# Altium PCB FreidoraAireCukiDigLeds_mirrored.PcbDoc
Units mil, origin at the board's own origin, x right, y up, seen from the top; angles counter-clockwise.
Board outline 3650 x 2850 mil, 2 copper layers (Top Layer, Bottom Layer); 50 components, 96 nets, 151 pads, 12 vias.
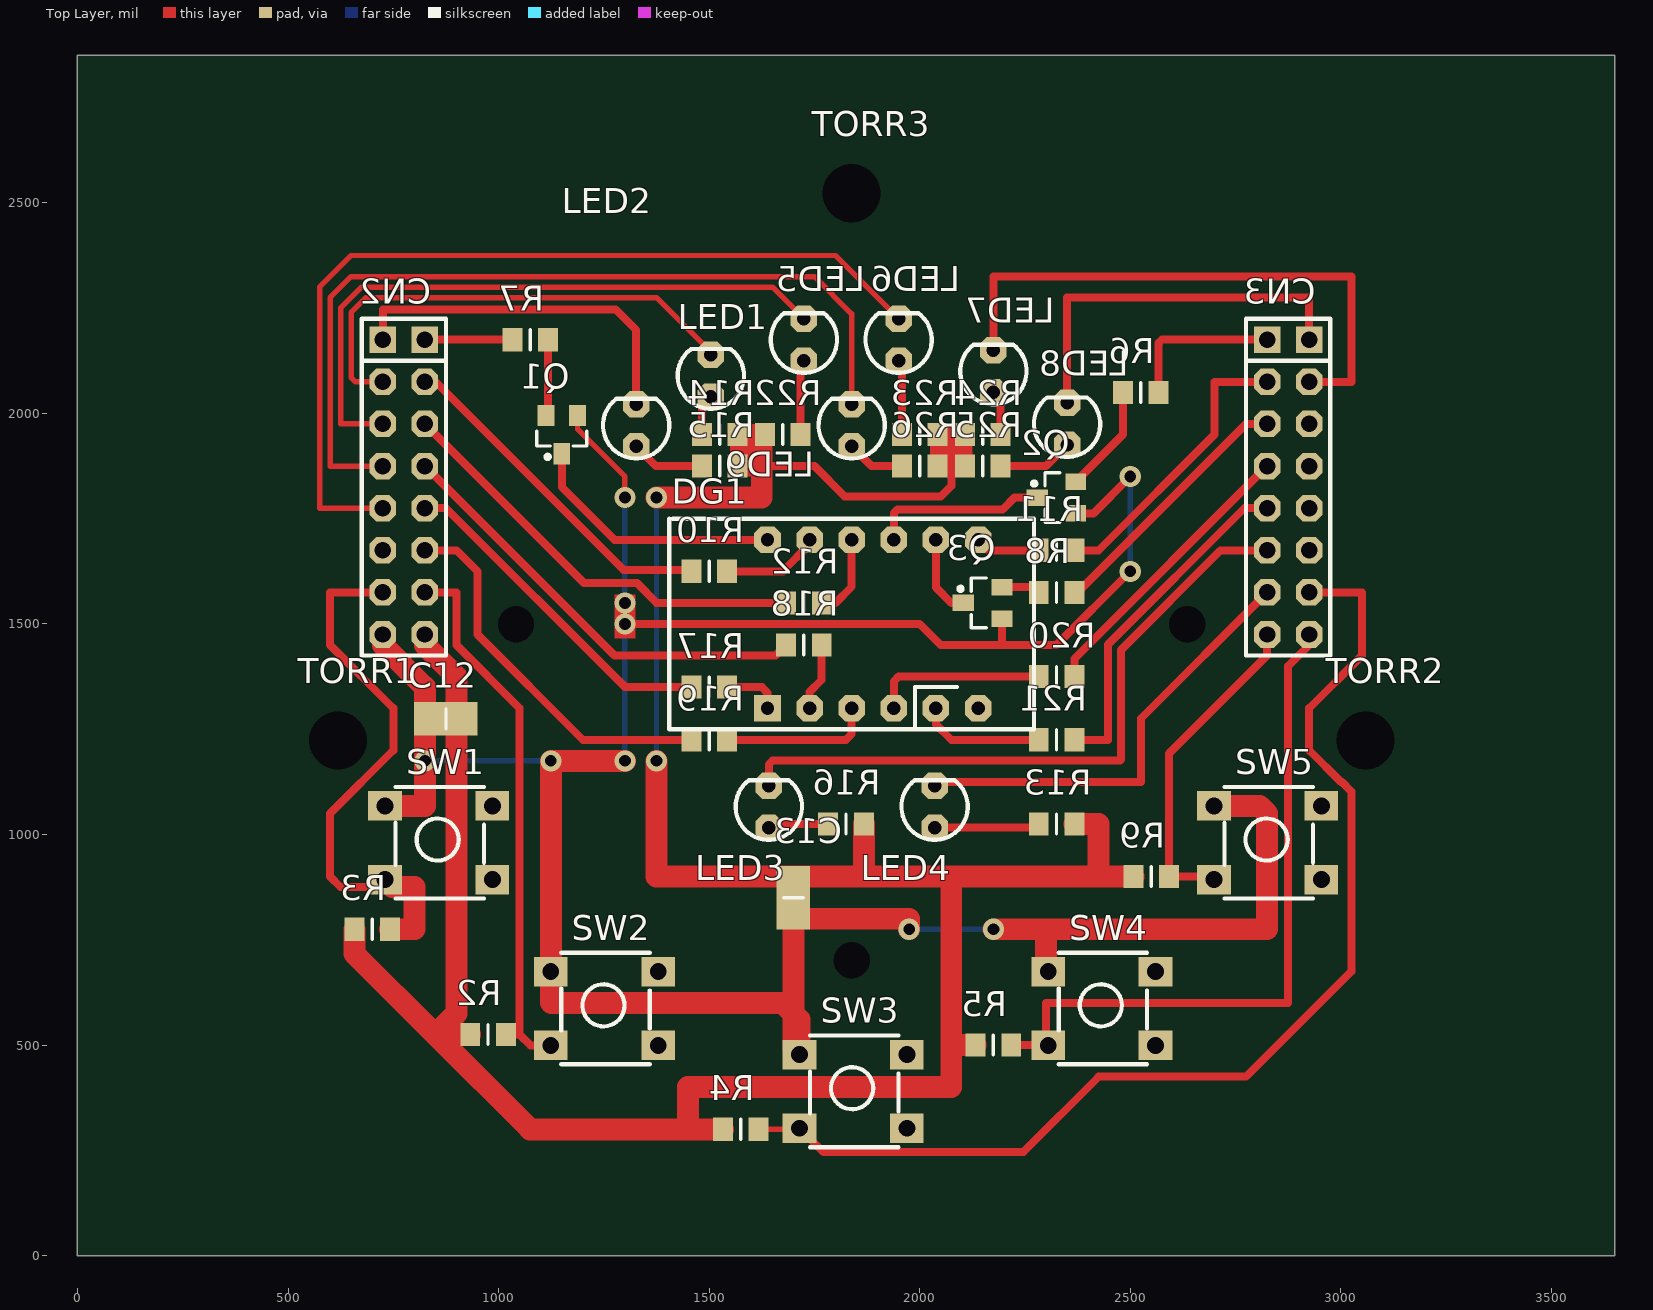
[diagram p0: Top Layer view]
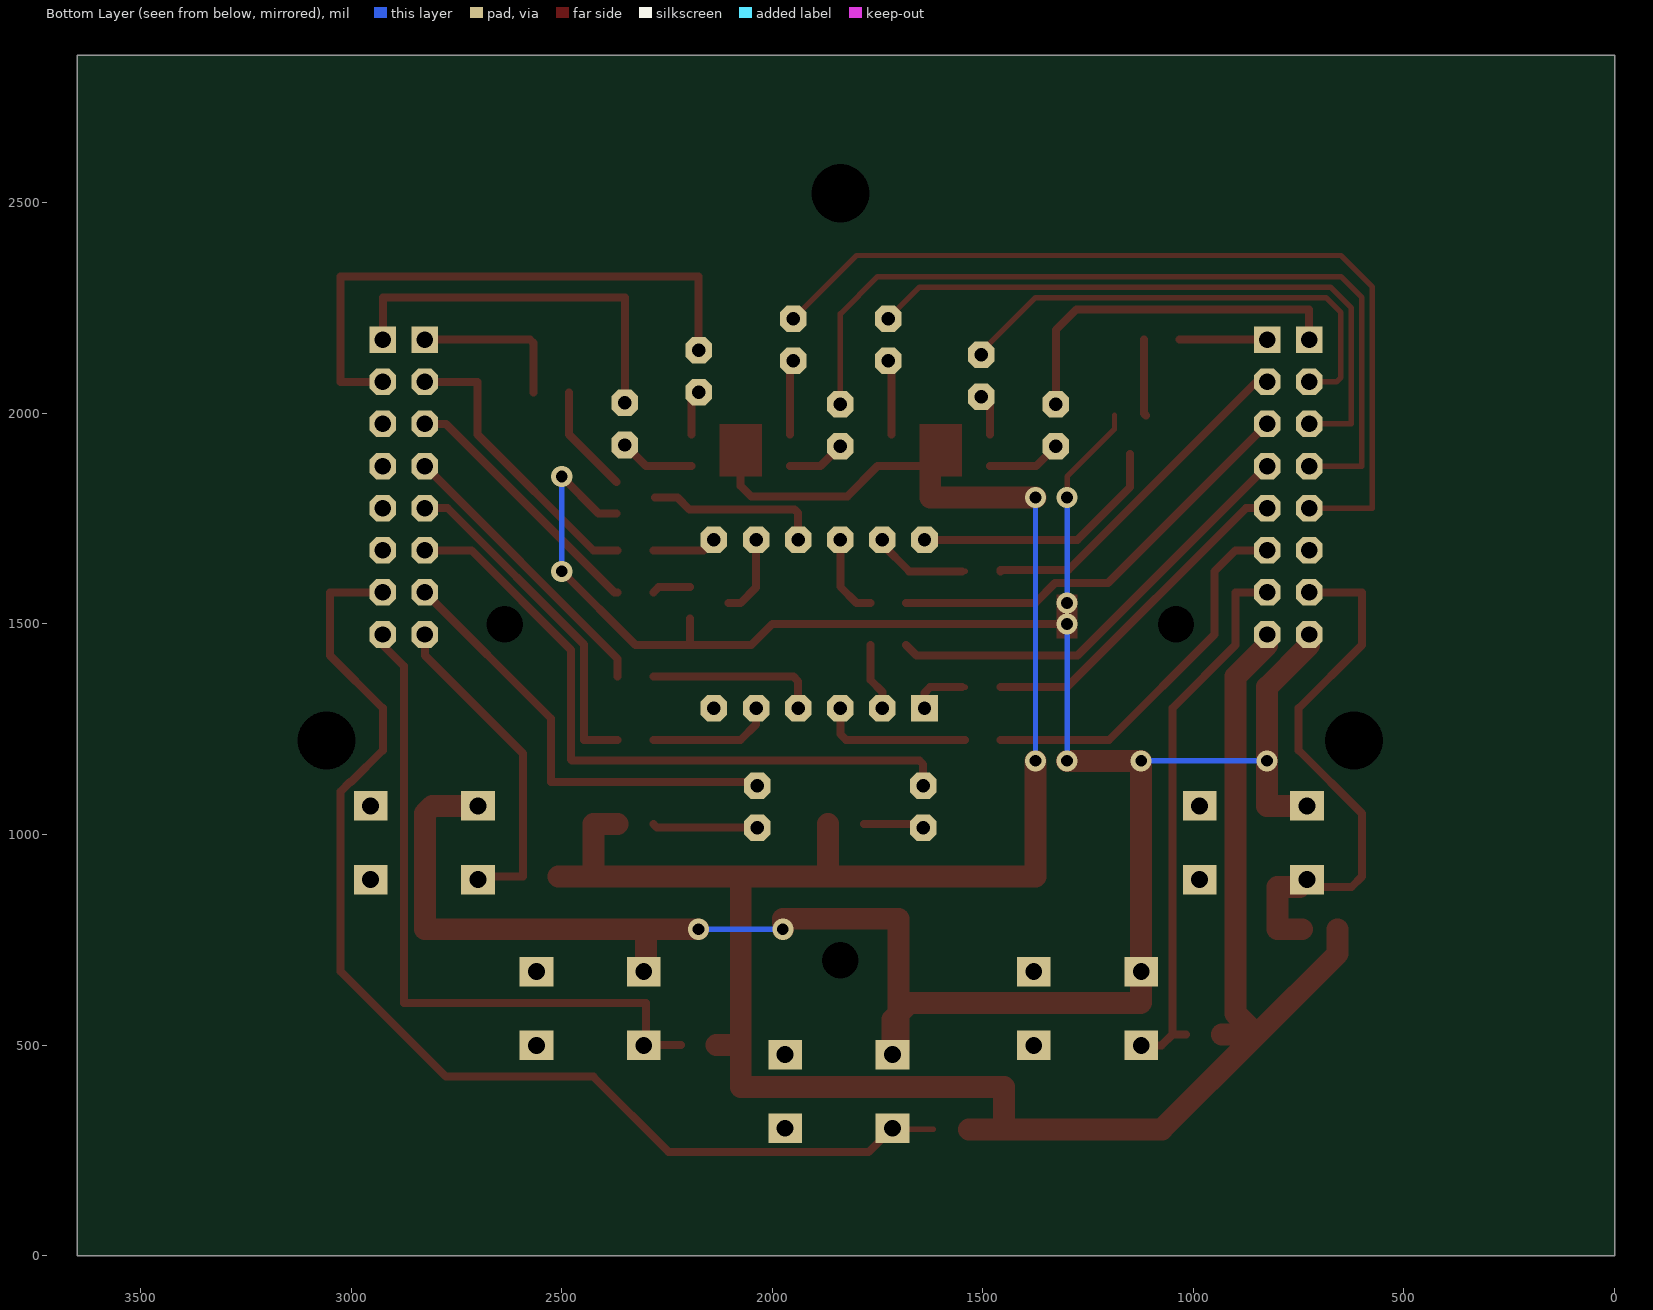
[diagram p1: Bottom Layer view, seen from below]

## Layer stack, top to bottom
Top Solder: solder mask 0.4, Solder Resist, Dk 3.5
Top Layer: signal copper 1.4
Dielectric1: dielectric 12.6, FR-4, Dk 4.8
Bottom Layer: signal copper 1.4
Bottom Solder: solder mask 0.4, Solder Resist, Dk 3.5

## Board outline
0,0 3650,0 3650,2850 0,2850

## Design rules (kind name [scope] priority, off if disabled: settings)
Clearance POLIGONOS [InPoly] p1: gap=20
Clearance [All] p2: gap=12
Clearance Clearance_1 [All] p3 off: gap=10
ComponentClearance [All] p1 off: gap=10 collisioncheckmode=3 verticalgap=10 showdistances=FALSE
FabricationTestPointUsage TestPointUsage [All] p1 off: valid=0 allowmultiple=FALSE
FabricationTestpoint Testpoint [All] p1: side=3 testpointundercomponent=TRUE minsize=40 maxsize=100 preferedsize=60 minholesize=0 maxholesize=40 preferedholesize=32 testpointgrid=1 allowsidetop=TRUE allowsidebottom=TRUE usegrid=TRUE gridtolerance=0.01
HoleSize [All] p1: absolutevalues=TRUE maxlimit=200 minlimit=1 maxpercent=80.000 minpercent=20.000
MinimumSolderMaskSliver [All] p1 off: minsoldermaskwidth=10
PlaneConnect [All] p1: planeconnectstyle=Relief reliefexpansion=20 reliefentries=4 reliefconductorwidth=14 reliefairgap=10
PolygonConnect [All] p1: connectstyle=Relief reliefconductorwidth=10 reliefentries=4 polygonreliefangle="90 Angle" airgapwidth=10
RoomDefinition FreidoraAireCukiMicro [InComponentClass('FreidoraAireCukiMicro')] p1: confinementstyle=ConfineIn formatcopy=TRUE lockcomponents=FALSE outline -10675,-9825 -8675,-9825 -8675,-8825 -10675,-8825
RoomDefinition FreidoraAireCukiDigLeds [InComponentClass('FreidoraAireCukiDigLeds')] p2: confinementstyle=ConfineIn formatcopy=TRUE lockcomponents=FALSE outline -225,-250 3775,-250 3775,2925 -225,2925
RoutingCorners [All] p1: cornerstyle=45-Degree minsetback=25 maxsetback=100
RoutingLayers [All] p1: top layer_v5=FALSE bottom layer_v5=FALSE
RoutingPriority [All] p1: routingpriority=2
RoutingVias [All] p1: holewidth=28 width=50 viastyle="Through Hole" minholewidth=28 minwidth=50 maxholewidth=28 maxwidth=55
ShortCircuit [All] p1 off: allowed=FALSE
SilkToSilkClearance [All] p1 off: silktosilkclearance=10
SilkToSolderMaskClearance SilkscreenOverComponentPads [IsPad] p1 off: minsilkscreentomaskgap=10 clearancetoexposedcopper=TRUE
SolderMaskExpansion [All] p1: expansion=4
Width "Width 39" [All] p1 off: maxlimit=300 minlimit=13 preferedwidth=39
Width "Width 96" [All] p2 off: maxlimit=300 minlimit=12 preferedwidth=96
Width "Width 19" [All] p3: maxlimit=300 minlimit=12 preferedwidth=19
Width "Width 300" [All] p4 off: maxlimit=300 minlimit=10 preferedwidth=300
Width "Width 12" [All] p5 off: maxlimit=300 minlimit=10 preferedwidth=12
Width "Width 65" [All] p6 off: maxlimit=300 minlimit=10 preferedwidth=65
Width "Width 150" [All] p7 off: maxlimit=300 minlimit=10 preferedwidth=150
Width "Width 26" [All] p8 off: maxlimit=300 minlimit=10 preferedwidth=26
Width "Width 13" [All] p9 off: maxlimit=300 minlimit=10 preferedwidth=13
Width "Width 52" [All] p10 off: maxlimit=300 minlimit=10 preferedwidth=52
18 further rules are at their usual default settings.

## Components (designator, comment, footprint, x,y, rotation, side; value= is the part's Value field where it differs from the comment)
C12 "10uF" C-0805_N 875,1275 r180 top
C13 "10uF" C-0805_N 1700,850 r90 top
CN2 "HEADER 8X2" SIP2X8 825,2175 r90 top
CN3 "HEADER 8X2" SIP2X8 2925,2175 r90 top
DG1 "5121CG-HG" DIGIT_3_400 1638.58,1300 r0 top
LED1 "LED" LED3MM#1 1503.94,2089.76 r0 top
LED2 "LED" LED3MM#1 1326.77,1971.65 r0 top
LED3 "LED" LED3MM#1 1641.73,1066.14 r0 top
LED4 "LED" LED3MM#1 2035.43,1066.14 r0 top
LED5 "LED" LED3MM#2 1725,2175 r180 top
LED6 "LED" LED3MM#2 1950,2175 r180 top
LED7 "LED" LED3MM#2 2175,2100 r180 top
LED8 "LED" LED3MM#2 2350,1975 r180 top
LED9 "LED" LED3MM#2 1838.58,1971.65 r180 top
Q1 "BC847" SOT23_BOTTOM 1150,1950 r270 top
Q2 "BC847" SOT23_BOTTOM 2325,1800 r180 top
Q3 "BC847" SOT23_BOTTOM 2150,1550 r180 top
R2 "RES1" 0805BOTTOM 975,525 r180 top
R3 "RES1" 0805BOTTOM 700,775 r180 top
R4 "RES1" 0805BOTTOM 1575,300 r180 top
R5 "RES1" 0805BOTTOM 2175,500 r180 top
R6 "2K7" R-0805_N_WAVE 2525,2050 r180 top
R7 "4K7" R-0805_N_WAVE 1075,2175 r0 top
R8 "2K7" R-0805_N_WAVE 2325,1575 r180 top
R9 "RES1" 0805BOTTOM 2550,900 r180 top
R10 "RES1" 0805BOTTOM 1500,1625 r180 top
R11 "RES1" 0805BOTTOM 2325,1675 r0 top
R12 "RES1" 0805BOTTOM 1725,1550 r180 top
R13 "RES1" 0805BOTTOM 2325,1025 r0 top
R14 "RES1" 0805BOTTOM 1525,1950 r0 top
R15 "RES1" 0805BOTTOM 1525,1875 r0 top
R16 "RES1" 0805BOTTOM 1825,1025 r0 top
R17 "RES1" 0805BOTTOM 1500,1350 r0 top
R18 "RES1" 0805BOTTOM 1725,1450 r0 top
R19 "RES1" 0805BOTTOM 1500,1225 r0 top
R20 "RES1" 0805BOTTOM 2325,1375 r180 top
R21 "RES1" 0805BOTTOM 2325,1225 r180 top
R22 "RES1" 0805BOTTOM 1675,1950 r180 top
R23 "RES1" 0805BOTTOM 2000,1950 r0 top
R24 "RES1" 0805BOTTOM 2150,1950 r180 top
R25 "RES1" 0805BOTTOM 2150,1875 r180 top
R26 "RES1" 0805BOTTOM 2000,1875 r0 top
SW1 "-" ZIPPY-TS 730.32,1068.11 r0 top
SW2 "+" ZIPPY-TS 1124.02,674.41 r0 top
SW3 "ON/OFF" ZIPPY-TS 1714.57,477.56 r0 top
SW4 "TIEMPO" ZIPPY-TS 2305.12,674.41 r0 top
SW5 "MODO" ZIPPY-TS 2698.82,1068.11 r0 top
TORR1 "" TORRETA 618.11,1223.62 r0 top
TORR2 "" TORRETA 3059.06,1223.62 r0 top
TORR3 "" TORRETA 1838.58,2522.83 r0 top

## Footprints (in the part's own frame and the unit in brackets; to place one, negate y for a bottom-side part, rotate by r counter-clockwise, add the part's x,y. Pads: shape width x height; smd on the part's side, far side on the other; paste and mask are expansions set on the pad)
0805BOTTOM [mm] "Chip Resistor, Body 2.0x1.2mm, IPC Medium Density"
  rect 1.2x1.4 smd: 1(-1.075,0) 2(1.075,0)
  silkscreen extent 0,-0.6 0,0.6, body extent -1.07,-0.7 1.07,0.7, height 0.7
C-0805_N [mil] "Chip Capacitor, Body 2.0x1.2mm, IPC Medium Density"
  rect 80x80 smd: 1(-35.43,0) 2(35.43,0)
  silkscreen extent 0,-24 0,24, body extent -43,-29 43,29, height 53
DIGIT_3_400 [mil] "7 segment single digit 400"
  rect 63x63 hole 32: 1(0,0)
  oct 63x63 hole 32: 2(100,0) 3(200,0) 4(300,0) 5(400,0) 6(500,0) 7(500,400) 8(400,400) 9(300,400) 10(200,400) 11(100,400) 12(0,400)
  silkscreen extent -233,-50 633,450
LED3MM#1 [mil]
  oct 63x63 hole 32: 1(0,-50) 2(0,50)
  silkscreen extent -79,-79 79,63, body extent -79,-79 79,66, height 181
LED3MM#2 [mil]
  oct 63x63 hole 32: 1(0,50) 2(0,-50)
  silkscreen extent -79,-63 79,79, body extent -79,-66 79,79, height 256
R-0805_N_WAVE [mm] "Chip Resistor, Body 2.0x1.2mm, IPC Medium Density, Wave soldering"
  rect 1.2x1.4 smd: 1(-1.075,0) 2(1.075,0)
  silkscreen extent 0,-0.6 0,0.6, body extent -1.1,-0.68 1.1,0.67, height 0.69
SIP2X8 [mil]
  rect 63x63 hole 39: 1(0,0) 2(0,100)
  oct 63x63 hole 39: 3(-100,0) 4(-100,100) 5(-200,0) 6(-200,100) 7(-300,0) 8(-300,100) 9(-400,0) 10(-400,100) 11(-500,0) 12(-500,100) 13(-600,0) 14(-600,100) 15(-700,0) 16(-700,100)
  silkscreen extent -750,-50 50,150
SOT23_BOTTOM [mm] "SOT23, 3-Leads, Body 2.9x1.3mm, Pitch 0.95mm, Lead Span 2.3mm - Reverse Pinning, IPC Medium Density"
  rect 1.25x1 smd: 1(-1.15,-0.95) 2(-1.15,0.95)
  rect 1.3x1 smd: 3(1.17,0)
  silkscreen extent -0.2,-1.5 1.47,1.5, body extent -0.7,-1.5 0.7,1.5, height 1.1
TORRETA [mm]
  round 3 hole 3.5: 0(0,0)
ZIPPY-TS [mil]
  rect 80x70 hole 40: 1(0,-175) 2(0,0) 3(255,0) 4(255,-175)
  silkscreen extent 25,-220 235,45

## Part data
C12 C13: library part CAP, "Non polarized capacitor"
CN2 CN3: "HEADER DE 2 X8"
DG1: library part "DIGITO x 3 400", "Dígito 0.52' cátodo común verde"
Q1 Q2 Q3: "NPN transistor bipolar"
R2 R3 R4 R5 R9 R10 R11 R12 R13 R14 R15 R16 R17 R18 R19 R20 R21 R22 R23 R24 R25 R26: "Resistor"
R6 R7 R8: library part RES, "Resistor"
SW1 SW2 SW3 SW4 SW5: library part TECLA
TORR1 TORR2 TORR3: library part TORRETA

## Free pads (board coordinates)
  round 19.68 hole 86.61: 0(1041.34,1499.21) 0(1838.58,701.97) 0(2635.83,1499.21)

## Via types
v1: diameter 50, hole 28, Top Layer to Bottom Layer, 12 vias

## Nets (pads, with @x,y where several pads share a name; then routed paths per layer and width w, separated by ;. In a path a pad name is that pad's centre, name@x,y a point inside that pad or via, vN(x,y) a via of type N, cw(c..) or ccw(c..) an arc to the next point about the centre after c; other vN are vias at no path point)
A: 
AGND: 
B: 
BAJAR: CN2.14 R3.1 SW1.1 | length 1292.3
  Top Layer w19: CN2.14 600,1575 600,1450 750,1300 750,1200 600,1050 600,900 625,875 SW1.1@748.43,875
  Top Layer w52: R3.1 800,775 800,875 SW1.1@748.43,875
BUZZER: 
C: 
D: 
DIG1: DG1.12 Q1.3 | length 619.3
  Top Layer w19: Q1.3 1150,1825 1275,1700 DG1.12
DIG2: DG1.9 Q2.3 | length 419
  Top Layer w19: DG1.9 1938.58,1763.58 1947,1772 2197,1772 2225,1800 Q2.3
DIG3: DG1.8 Q3.3 | length 194
  Top Layer w19: DG1.8 2038.58,1586.42 2075,1550 Q3.3
DIGITO1: CN2.1 R7.1 | length 207.7
  Top Layer w19: CN2.1 R7.1
DIGITO2: CN3.2 R6.1 | length 378.2
  Top Layer w19: R6.1 2567.32,2167.32 2575,2175 CN3.2
DIGITO3: CN3.6 R8.1 | length 623.4
  Top Layer w19: R8.1 2375,1575 2775,1975 CN3.6
DP: 
E: 
F: 
FAN: 
G: 
GND: C12.2 C13.1 CN2.16 Q1.2 Q2.2 Q3.2 SW1.2 SW2.2 SW3.2 SW4.2 SW5.2 | length 6835.7
  Top Layer w13: Q1.2 1187.4,1962.6 1300,1850 v1(1300,1800)
  Top Layer w19: v1(1300,1500) 2000,1500 2050,1450 2195.28,1450 ; Q3.2 2195.28,1450 ; Q2.2 2412.6,1762.6 v1(2500,1850) ; v1(2500,1625) 2325,1450 2195.28,1450
  Top Layer w52: CN2.16 725,1450 825,1350 v1(825,1175) 825,1068.11 SW1.2 ; v1(1300,1175) v1(1124.02,1175) SW2.2 1124.02,600.98 1125,600 1675,600 1700,575 ; v1(1975,775) 1975,800 1700,800 1700,575 ; v1(2175,775) 2300,775 ; SW4.2 2300,679.53 2300,775 ; SW5.2 2806.89,1068.11 2825,1050 2825,775 2300,775 ; 1700,575 1700,492.13 SW3.2 1714.57,560.43 1700,575
  Bottom Layer w13: v1(825,1175) v1(1124.02,1175) ; v1(1300,1175) v1(1300,1500) ; v1(1300,1550) v1(1300,1800) ; v1(1975,775) v1(2175,775) ; v1(2500,1625) v1(2500,1850)
HEAT: 
LED1: 
LED1_DR: CN2.4 LED1.2 | length 1161.9
  Top Layer w13: CN2.4 660.36,2075 650,2085.36 650,2239.64 685.36,2275 1375,2275 LED1.2@1503.94,2146.06
  Top Layer w19: LED1.2 LED1.2@1503.94,2146.06
LED2: 
LED2_DR: CN2.2 LED2.2 | length 870.5
  Top Layer w19: CN2.2 725,2247 1278,2247 1326.77,2198.23 LED2.2
LED3: 
LED3_DR: CN3.12 LED3.2 | length 1596.9
  Top Layer w19: LED3.2 1641.73,1166.73 1650.94,1175.94 2475.94,1175.94 2478,1178 2478,1438.4 2714.6,1675 CN3.12
LED4: 
LED4_DR: CN3.14 LED4.2 | length 1067.5
  Top Layer w19: LED4.2 2044.29,1125 2525,1125 2525,1275 CN3.14
LED5: 
LED5_DR: CN2.6 LED5.2 | length 1526.8
  Top Layer w13: CN2.6 625,1975 625,2250 675,2300 1650,2300 LED5.2
LED6: 
LED6_DR: CN2.10 LED6.2 | length 2143.2
  Top Layer w13: CN2.10 575,1775 575,2300 650,2375 1800,2375 LED6.2
LED7: 
LED7_DR: CN3.3 LED7.2 | length 1375
  Top Layer w19: LED7.2 2175,2325 3025,2325 3025,2075 CN3.3
LED8: 
LED8_DR: CN3.1 LED8.2 | length 925
  Top Layer w19: LED8.2 2350,2275 2925,2275 CN3.1
LED9: 
LED9_DR: CN2.8 LED9.2 | length 2035.7
  Top Layer w13: CN2.8 600,1875 600,2275 650,2325 1750,2325 1838.58,2236.42 LED9.2
MODO: CN3.16 R9.1 SW5.1 | length 780.7
  Top Layer w19: SW5.1 2691.93,900 R9.1 2592.32,1192.32 2825,1425 CN3.16
NetC9_1: 
NetDG1_1: DG1.1 R17.2 | length 138.3
  Top Layer w13: R17.2 R17.2@1550,1350
  Top Layer w19: R17.2@1550,1350 1625,1350 1638.58,1336.42 DG1.1
NetDG1_2: DG1.2 R18.2 | length 161.9
  Top Layer w19: DG1.2 1738.58,1338.58 1767.32,1367.32 R18.2
NetDG1_3: DG1.3 R19.2 | length 363.3
  Top Layer w19: R19.2 1825,1225 1838.58,1238.58 DG1.3
NetDG1_4: DG1.4 R20.2 | length 412.4
  Top Layer w19: DG1.4 1938.58,1363.58 1950,1375 R20.2
NetDG1_5: DG1.5 R21.2 | length 297.8
  Top Layer w19: DG1.5 2038.58,1261.42 2075,1225 R21.2
NetDG1_7: DG1.7 R11.1 | length 154.4
  Top Layer w19: DG1.7 2163.58,1675 R11.1
NetDG1_10: DG1.10 R12.1 | length 198.7
  Top Layer w19: R12.1 1800,1550 1838.58,1588.58 DG1.10
NetDG1_11: DG1.11 R10.1 | length 234
  Top Layer w13: R10.1 R10.1@1550,1625
  Top Layer w19: R10.1@1550,1625 1675,1625 1738.58,1688.58 DG1.11
NetJP2_1: 
NetJP2_2: 
NetLED1_1: LED1.1 R14.1 | length 98.6
  Top Layer w19: R14.1 1482.68,2018.5 LED1.1
NetLED2_1: LED2.1 R15.1 | length 175.2
  Top Layer w19: LED2.1 1373.43,1875 R15.1
NetLED3_1: LED3.1 R16.1 | length 144.6
  Top Layer w19: LED3.1 1650.59,1025 R16.1
NetLED4_1: LED4.1 R13.1 | length 250.9
  Top Layer w19: LED4.1 2273.82,1016.14 R13.1
NetLED5_1: LED5.1 R22.1 | length 178.2
  Top Layer w19: R22.1 1717.32,2117.32 LED5.1
NetLED6_1: LED6.1 R23.1 | length 178.2
  Top Layer w19: LED6.1 1957.68,2117.32 R23.1
NetLED7_1: LED7.1 R24.1 | length 107.2
  Top Layer w19: LED7.1 2192.32,2032.68 R24.1
NetLED8_1: LED8.1 R25.1 | length 178.4
  Top Layer w19: R25.1 2300,1875 LED8.1
NetLED9_1: LED9.1 R26.1 | length 138.4
  Top Layer w19: LED9.1 1885.24,1875 R26.1
NetQ1_1: Q1.1 R7.2 | length 181.7
  Top Layer w19: Q1.1 1117.32,2000 R7.2
NetQ2_1: Q2.1 R6.2 | length 259.2
  Top Layer w19: Q2.1 2482.68,1949.8 R6.2
NetQ3_1: Q3.1 R8.2 | length 92.5
  Top Layer w19: Q3.1 2270.28,1587.4 R8.2
NetQ4_1: 
NetQ5_1: 
NetQ6_1: 
NetQ7_1: 
NetQ8_1: 
NetQ9_1: 
NetQ10_1: 
NetQ11_1: 
NetQ12_1: 
NetQ13_1: 
NetQ14_1: 
NetQ15_1: 
NetQ16_1: 
NetQ17_1: 
NetQ18_1: 
NetQ19_1: 
NetQ20_1: 
NTC_10K: 
ONOFF: CN3.13 R4.1 SW3.1 | length 2729.4
  Top Layer w13: R4.1 1712.01,300 SW3.1
  Top Layer w19: SW3.1 1771.07,246.06 2246.06,246.06 2425,425 2650,425 2775,425 3025,675 3025,1102.33 3002.73,1124.61 3000.39,1124.61 2925,1200 2925,1300 3050,1425 3050,1575 CN3.13
RESET: 
SEG_A: CN2.3 R10.2 | length 820.8
  Top Layer w19: CN2.3 850,2075 1297,1628 1457.68,1628 R10.2
SEG_B: CN3.4 R11.2 | length 696.6
  Top Layer w19: R11.2 2425,1675 2700,1950 2700,2075 CN3.4
SEG_C: CN3.8 R20.1 | length 689.6
  Top Layer w19: R20.1 2367.32,1417.32 CN3.8
SEG_D: CN2.7 R18.1 | length 1054.4
  Top Layer w19: CN2.7 1275,1425 1657.68,1425 R18.1
SEG_DP: CN2.11 R19.1 | length 906.9
  Top Layer w19: CN2.11 900,1675 950,1625 950,1475 1200,1225 R19.1
SEG_E: CN2.9 R17.1 | length 808.7
  Top Layer w19: CN2.9 875,1775 1300,1350 R17.1
SEG_F: CN2.5 R12.2 | length 1033.7
  Top Layer w19: CN2.5 1203,1597 1328.41,1597 1375.41,1550 R12.2
SEG_G: CN3.10 R21.1 | length 818
  Top Layer w19: R21.1 2447,1225 2447,1451.24 2770.76,1775 CN3.10
SUBIR: CN2.13 R2.1 SW2.1 | length 1304.4
  Top Layer w19: CN2.13 900,1575 900,1450 1050,1300 1050,525 ; R2.1 1050,525 ; SW2.1 1075.59,499.41 1050,525
SWDCLK: 
SWDIO: 
TEMPERATURA: 
TIEMPO: CN3.15 R5.1 SW4.1 | length 1659.8
  Top Layer w19: R5.1 2304.53,500 2300,504.53 2300,600 2875,600 2875,1400 2925,1450 CN3.15
VCC: C12.1 C13.2 CN2.15 R2.2 R3.2 R4.2 R5.2 R9.2 R13.2 R14.2 R15.2 R16.2 R22.2 R23.2 R24.2 R25.2 R26.2 | length 6932.9
  Top Layer w13: R26.2 R23.2 ; R25.2 R24.2
  Top Layer w19: R15.2 1625,1875 1750,1875 1822,1803 2050,1803 2075,1828 2075,1925
  Top Layer w52: R3.2 657.68,717.32 850,525 ; CN2.15 825,1450 900,1375 900,575 850,525 ; R2.2 850,525 ; v1(1375,1175) 1375,900 2075,900 ; v1(1375,1800) 1625,1800 1625,1875 ; R4.2 1450,300 ; 1867.32,900 R16.2 ; R5.2 2075,500 ; R13.2 2425,1025 2425,900 ; R9.2 2425,900 ; 850,525 1075,300 1450,300 ; 1450,300 1450,400 2075,400 2075,500 ; 2075,500 2075,900 ; 2075,900 2425,900
  Bottom Layer w13: v1(1375,1175) v1(1375,1800)
pads on no net: CN2.12 CN3.5 CN3.7 CN3.9 CN3.11 DG1.6 SW1.3 SW1.4 SW2.3 SW2.4 SW3.3 SW3.4 SW4.3 SW4.4 SW5.3 SW5.4 TORR1.0 TORR2.0 TORR3.0

## Other copper
Top Layer:
  region net VCC: 2125,1975 2025,1975 2025,1850 2125,1850
  region net VCC: 1650,1975 1550,1975 1550,1850 1650,1850
  region net GND: 1325,1570 1275,1570 1275,1465 1325,1465

## Silkscreen, mask and mechanical layers (free items; w line width, h text height)
Mechanical 4:
  lines w10: 500,1050 500,2075 ; 500,1075 ccw(c1376.08,1076.08) 1377.17,200 ; 500,1975 cw(c1237.5,2037.5) 812.97,2643.79 ; 809.06,2640.94 2865.95,2640.94 ; 1300,200 2350,200 ; 2300,200 ccw(c2301.08,1076.08) 3177.17,1075 ; 2864.2,2643.79 cw(c2439.67,2037.5) 3177.17,1975 ; 3177.17,1050 3177.17,2122.83
Mechanical 13:
  circle w10: c1838.58,2522.83 r68.9
  circle w10: c618.11,1223.62 r68.9
  circle w10: c3059.06,1223.62 r68.9
  circle w10: c3059.06,1223.62 r118.11
  circle w10: c618.11,1223.62 r118.11
  circle w10: c1838.58,2522.83 r118.11
  circle w10: c1838.58,396.85 r39.37
  circle w10: c1248.03,593.7 r39.37
  circle w10: c2429.13,593.7 r39.37
  circle w10: c2822.84,987.4 r39.37
  circle w10: c854.33,987.4 r39.37
  circle w10: c1641.73,1066.14 r39.37
  circle w10: c2035.43,1066.14 r39.37
  circle w10: c1838.58,1971.65 r39.37
  circle w10: c1838.58,1499.21 r797.24
  circle w10: c1041.34,1499.21 r19.68
  circle w10: c1838.58,701.97 r19.68
  circle w10: c2635.83,1499.21 r19.68
  circle w10: c1326.77,1971.65 r39.37
  circle w10: c2350.39,1971.65 r39.37
  circle w10: c1503.94,2089.76 r39.37
  circle w10: c2173.23,2089.76 r39.37
  circle w10: c1720.47,2168.5 r39.37
  circle w10: c1956.69,2168.5 r39.37
  lines w10: 775.59,987.4 933.07,987.4 ; 854.33,908.66 854.33,1066.14 ; 1169.29,593.7 1326.77,593.7 ; 1248.03,525 1248.03,653.15 ; 1675,1499.21 1975,1499.21 ; 1799.21,396.85 1877.95,396.85 ; 1838.58,300 1838.58,475 ; 1838.58,1400 1838.58,1575 ; 2350.39,593.7 2507.88,593.7 ; 2429.13,525 2429.13,675 ; 2744.1,987.4 2901.58,987.4 ; 2822.84,908.66 2822.84,1066.14 ; 3175,2125 3177.17,2122.83 ; 1395.67,1223.62 2281.5,1223.62 2281.5,1774.8 1395.67,1774.8 1395.67,1223.62